# Altium PCB LED_Shield_PCB_v11.PcbDoc
Units mil, origin at the board's own origin, x right, y up, seen from the top; angles counter-clockwise.
Board outline 2700 x 2100 mil, 2 copper layers (Top Layer, Bottom Layer); 10 components, 6 nets, 24 pads, 0 vias.
Unrouted connection lines stored in the file: 15.
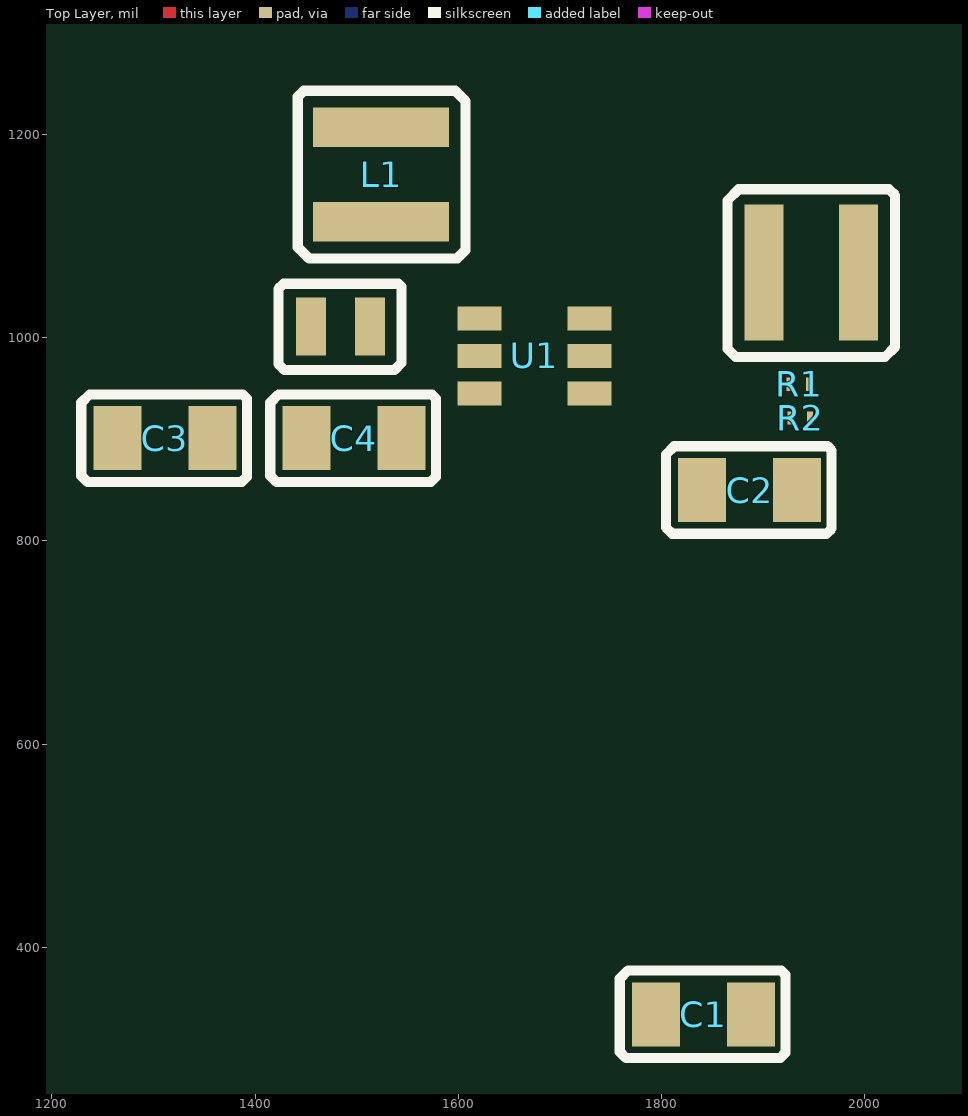
[diagram p0: Top Layer view]
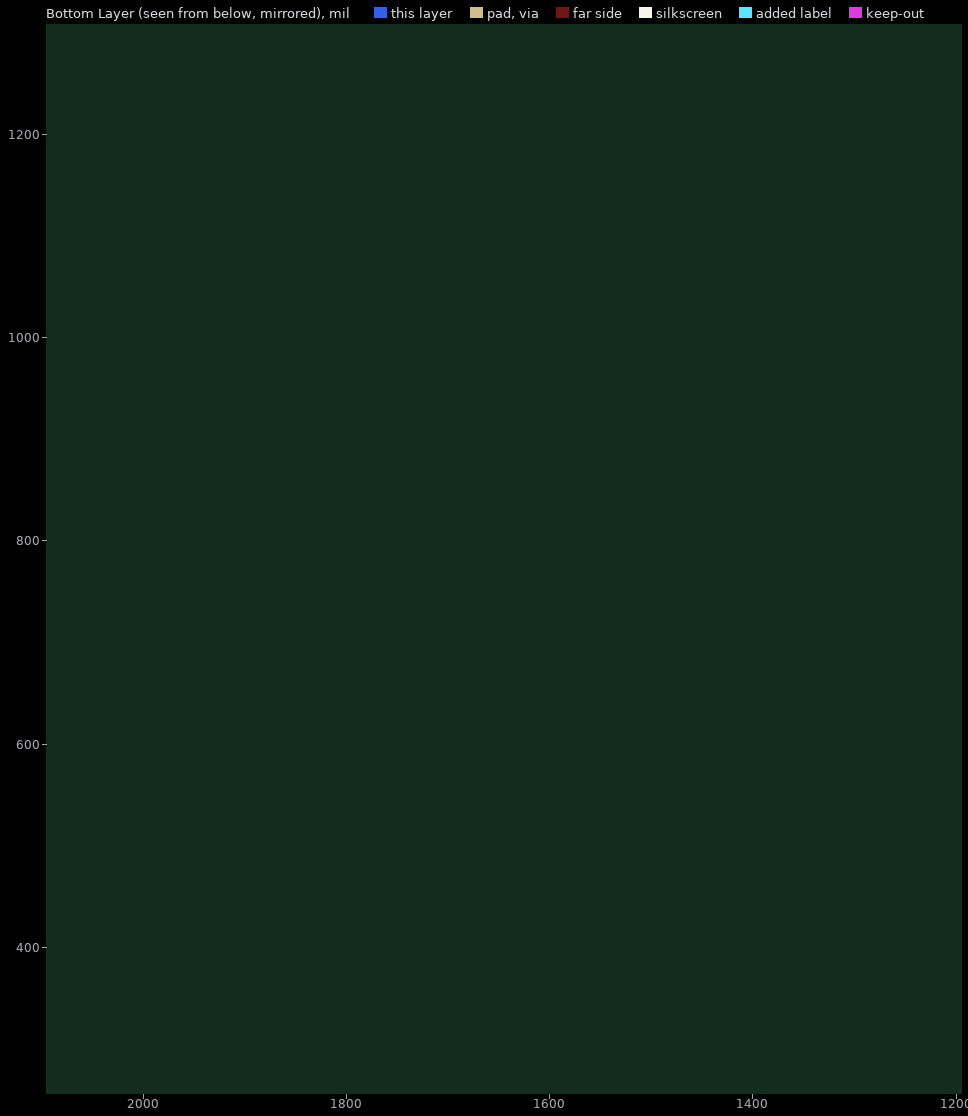
[diagram p1: Bottom Layer view, seen from below]

## Layer stack, top to bottom
Top Solder: solder mask 0.4, Solder Resist, Dk 3.5
Top Layer: signal copper 1.4
Dielectric 1: dielectric 12.6, FR-4, Dk 4.8
Bottom Layer: signal copper 1.4
Bottom Solder: solder mask 0.4, Solder Resist, Dk 3.5

## Board outline
0,0 2700,0 2700,2100 0,2100

## Design rules (kind name [scope] priority, off if disabled: settings)
Clearance [All] p1: gap=10 ignorepadtopadclearanceinfootprint=FALSE
PolygonConnect [All] p1: connectstyle=Relief reliefconductorwidth=10 reliefentries=4 polygonreliefangle="90 Angle" airgapwidth=10
RoutingVias [All] p1: holewidth=28 width=50 viastyle="Through Hole" minholewidth=28 minwidth=50 maxholewidth=28 maxwidth=50
SolderMaskExpansion [All] p1: expansion=4 istentingtop=FALSE
SupplyNets "Schematic Supply Nets" [InNet('GND')] p1: voltage=0.000
Width [All] p1: maxlimit=10 minlimit=10 preferedwidth=10
30 further rules are at their usual default settings.

## Components (designator, comment, footprint, x,y, rotation, side; value= is the part's Value field where it differs from the comment)
C1 "22uF" "C_0805 (2012 Metric)_3" 19686,-19031 r0 top value=22µF
C2 "22uF" "C_0805 (2012 Metric)_3" 19731.54,-18515 r0 top value=22µF
C3 "10uF" "C_0805 (2012 Metric)" 1309,900 r0 top value=10µF
C4 "10uF" "C_0805 (2012 Metric)" 1495,900 r0 top value=10µF
L1 "XGL4030-472MEC" "L_1616 (4040 Metric)" 1521,1159 r90 top
R1 "56.2K Ohm" "R_0201 (0603 Metric)_2" 1936,957 r0 top value=56.2kΩ
R2 "10K Ohm" "R_0201 (0603 Metric)_2" 1937,924 r0 top value=10kΩ
U1 "TPS562200DDCR" "U_SOT-23-6 Thin, TSOT-23-6" 1699,974 r0 top
? "XGL4030-472MEC" "L_1616 (4040 Metric)" 1946,1067 r0 top
? "0.1uF" "C_0805 (2012 Metric)_2" 1500,1009 r180 top value=100nF

## Footprints (in the part's own frame and the unit in brackets; to place one, negate y for a bottom-side part, rotate by r counter-clockwise, add the part's x,y. Pads: shape width x height; smd on the part's side, far side on the other; paste and mask are expansions set on the pad)
"C_0805 (2012 Metric)" [mm]
  rect 1.2x1.6 smd: 0(-1.131,0.025) 1(1.245,0.025)
  silkscreen extent -2.03,-1.07 2.11,1.12
"C_0805 (2012 Metric)_2" [mil]
  rect 29.53x57.09 smd: 0(-13,-2) 1(45,-2)
  silkscreen extent -44,-44 77,41
"C_0805 (2012 Metric)_3" [mm]
  rect 1.2x1.6 smd: 0(-454.445,491.871) 1(-452.069,491.871)
  silkscreen extent -455.35,490.78 -451.21,492.96
"L_1616 (4040 Metric)" [mil]
  rect 38.58x133.86 smd: 0(-45,-3) 1(48,-3)
  silkscreen extent -81,-86 84,79
"R_0201 (0603 Metric)_2" [mil]
  rect 5.91x12.99 smd: 0(-10,-3) 1(9,-3)
"U_SOT-23-6 Thin, TSOT-23-6" [mil]
  rect 43.31x23.62 smd: 1(-78,45) 2(-78,8) 3(-78,-29) 4(30,-29) 5(30,8) 6(30,45)

## Part data
C1 C2: library part MSASL219LB5226MTNA01, "Ceramic Capacitor, Multilayer, Ceramic, 10V, 20% +Tol, 20% -Tol, X5R, 15% TC, 22uF, Surface Mount, 0805", Dielectric Material=Ceramic, Manufacturer="TAIYO YUDEN", Max Operating Temperature=85°C, Min Operating Temperature=-55°C, Supplier Part Number=963-MSASL219LB5226MT, Voltage Rating (DC)=10V, Category="Ceramic Capacitors", ComponentLink1Description=https://datasheet.octopart.com:443/MSASL219LB5226MTNA01-Taiyo-Yuden-datasheet-182125419.pdf?src-supplier=IHS, ComponentLink1URL=https://datasheet.octopart.com:443/MSASL219LB5226MTNA01-Taiyo-Yuden-datasheet-182125419.pdf?src-supplier=IHS, Export Control Classification Number (ECCN) Code=EAR99, Harmonized Tariff Schedule (HTS) Code=8532.24.00.20, Height=850µm, Length=2mm, Lifecycle Status=Production, Manufacturer Part Number=MSASL219LB5226MTNA01, Mounting Technology="Surface Mount", Number of Terminals=2, Pricing="1=0,27, 10=0,114, 50=0,114, 100=0,101, 1000=0,072, 10000=0,067 (USD)", REACH SVHC=Yes, RoHS=Compliant, Stock=10806, Supplier=Mouser, Width=1.25mm, Introduction Date=2022-02-17
C3 C4: library part MSAST219LB5106KTNA01, "Ceramic Capacitor, Multilayer, Ceramic, 25V, 10% +Tol, 10% -Tol, X5R, 15% TC, 10uF, Surface Mount, 0805", Dielectric Material=Ceramic, Manufacturer="TAIYO YUDEN", Max Operating Temperature=85°C, Min Operating Temperature=-55°C, Voltage Rating (DC)=25V, Category="Ceramic Capacitors", ComponentLink1Description=https://datasheet.octopart.com:443/MSAST219LB5106KTNA01-Taiyo-Yuden-datasheet-182126366.pdf?src-supplier=IHS, ComponentLink1URL=https://datasheet.octopart.com:443/MSAST219LB5106KTNA01-Taiyo-Yuden-datasheet-182126366.pdf?src-supplier=IHS, Export Control Classification Number (ECCN) Code=EAR99, Harmonized Tariff Schedule (HTS) Code=8532.24.00.20, Height=850µm, Length=2mm, Lifecycle Status=Production, Manufacturer Part Number=MSAST219LB5106KTNA01, Mounting Technology="Surface Mount", Number of Terminals=2, Pricing="1=0,0066 (USD)", REACH SVHC=Yes, RoHS=Compliant, Stock=7, Supplier="Arrow Electronics", Supplier Part Number=MSAST219LB5106KTNA01, Width=1.25mm, Introduction Date=2022-02-17
L1 ?: "4.7 µH Shielded Molded Inductor 6.6 A 31.5mOhm Max 1616 (4040 Metric)"
R1: library part RC0201FR-0756K2L, "Res Thick Film 0201 56.2K Ohm 1% 0.05W(1/20W) ±200ppm/C Molded SMD Paper T/R", Case Code (Metric)=0603, Case Code (Imperial)=0201, Manufacturer="Yageo Group", Max Operating Temperature=125°C, Max Power Dissipation=50mW, Min Operating Temperature=-55°C, Supplier Part Number=3951640, Temperature Coefficient=200ppm/°C, Tolerance=1%, Voltage Rating=25V, Case/Package=0201, Category="Chip SMD Resistors", China RoHS=Non-Compliant, ComponentLink1Description=https://datasheet.octopart.com:443/RC0201FR-0756K2L-Yageo-datasheet-175887523.pdf?src-supplier=IHS, ComponentLink1URL=https://datasheet.octopart.com:443/RC0201FR-0756K2L-Yageo-datasheet-175887523.pdf?src-supplier=IHS, ComponentLink2Description=https://datasheet.octopart.com:443/RC0201FR-0756K2L-Yageo-datasheet-13314888.pdf?src-supplier=Upverter, ComponentLink2URL=https://datasheet.octopart.com:443/RC0201FR-0756K2L-Yageo-datasheet-13314888.pdf?src-supplier=Upverter, ComponentLink3Description=https://datasheet.octopart.com:443/RC0201FR-0756K2L-Yageo-datasheet-12549147.pdf?src-supplier=Upverter, ComponentLink3URL=https://datasheet.octopart.com:443/RC0201FR-0756K2L-Yageo-datasheet-12549147.pdf?src-supplier=Upverter, ComponentLink4Description=https://datasheet.octopart.com:443/RC0201FR-0756K2L-Yageo-datasheet-12509741.pdf?src-supplier=Upverter, ComponentLink4URL=https://datasheet.octopart.com:443/RC0201FR-0756K2L-Yageo-datasheet-12509741.pdf?src-supplier=Upverter, ComponentLink5Description=https://datasheet.octopart.com:443/RC0201FR-0756K2L-Yageo-datasheet-12509713.pdf?src-supplier=Upverter, ComponentLink5URL=https://datasheet.octopart.com:443/RC0201FR-0756K2L-Yageo-datasheet-12509713.pdf?src-supplier=Upverter, ComponentLink6Description=https://datasheet.octopart.com:443/RC0201FR-0756K2L-Yageo-Group-datasheet-176638170.pdf?src-supplier=Future+Electronics, ComponentLink6URL=https://datasheet.octopart.com:443/RC0201FR-0756K2L-Yageo-Group-datasheet-176638170.pdf?src-supplier=Future+Electronics, ComponentLink7Description=https://datasheet.octopart.com:443/RC0201FR-0756K2L-Yageo-datasheet-164759695.pdf?src-supplier=Future+Electronics, ComponentLink7URL=https://datasheet.octopart.com:443/RC0201FR-0756K2L-Yageo-datasheet-164759695.pdf?src-supplier=Future+Electronics, ComponentLink8Description=https://datasheet.octopart.com:443/RC0201FR-0756K2L-Yageo-datasheet-137700087.pdf?src-supplier=Future+Electronics, ComponentLink8URL=https://datasheet.octopart.com:443/RC0201FR-0756K2L-Yageo-datasheet-137700087.pdf?src-supplier=Future+Electronics, ComponentLink9Description=https://datasheet.octopart.com/RC0201FR-0756K2L-Yageo-datasheet-73766026.pdf, ComponentLink9URL=https://datasheet.octopart.com/RC0201FR-0756K2L-Yageo-datasheet-73766026.pdf, ComponentLink10Description=http://sigma.octopart.com:80/conflict_mineral_statement/Yageo-company-3.pdf?src-supplier=Compliance+Statements, ComponentLink10URL=http://sigma.octopart.com:80/conflict_mineral_statement/Yageo-company-3.pdf?src-supplier=Compliance+Statements, ComponentLink11Description=http://sigma.octopart.com:80/rohs_statement/Yageo-company-2.pdf?src-supplier=Compliance+Statements, ComponentLink11URL=http://sigma.octopart.com:80/rohs_statement/Yageo-company-2.pdf?src-supplier=Compliance+Statements, Composition="Thick Film", Country of Origin="Mainland China, Taiwan", Depth=300µm, Export Control Classification Number (ECCN) Code=EAR99, Features="Moisture Resistant", Harmonized Tariff Schedule (HTS) Code=8533.21.00.30, Height=230µm, Length=600µm, Lifecycle Status=Production, Manufacturer Part Number=RC0201FR-0756K2L, Military Standard=Not, Mounting Technology="Surface Mount", Number of Terminals=2, Number of Terminations=2, Power Dissipation=50mW, Power Rating=50mW, Pricing="10=0,0121, 100=0,0086, 500=0,0066, 2500=0,0039, 5000=0,0038 (EUR)", REACH SVHC=Yes, RoHS=Compliant, Schedule B="8533210045, 8533210045|8533210045, 8533210045|8533210045|8533210045, 8533210045|8533210045|8533210045|8533210045", Stock=32331, Supplier=Farnell, Width=300µm, Working Voltage=25V, Introduction Date=2008-07-18
R2: library part RC0201FR-0710KL, "Res Thick Film 0201 10K Ohm 1% 0.05W(1/20W) ±200ppm/C Pad SMD T/R", Case Code (Metric)=0603, Case Code (Imperial)=0201, Manufacturer="Yageo Group", Max Operating Temperature=125°C, Max Power Dissipation=50mW, Min Operating Temperature=-55°C, Supplier Part Number=1857008, Temperature Coefficient=200ppm/°C, Tolerance=1%, Voltage Rating=25V, Case/Package=0201, Category="Chip SMD Resistors", China RoHS=Non-Compliant, ComponentLink1Description=https://datasheet.octopart.com:443/RC0201FR-0710KL-Yageo-datasheet-175887523.pdf?src-supplier=IHS, ComponentLink1URL=https://datasheet.octopart.com:443/RC0201FR-0710KL-Yageo-datasheet-175887523.pdf?src-supplier=IHS, ComponentLink2Description=https://datasheet.octopart.com:443/RC0201FR-0710KL-Yageo-datasheet-12509713.pdf?src-supplier=element14+APAC, ComponentLink2URL=https://datasheet.octopart.com:443/RC0201FR-0710KL-Yageo-datasheet-12509713.pdf?src-supplier=element14+APAC, ComponentLink3Description=https://datasheet.octopart.com:443/RC0201FR-0710KL-Yageo-datasheet-62067350.pdf?src-supplier=element14+APAC, ComponentLink3URL=https://datasheet.octopart.com:443/RC0201FR-0710KL-Yageo-datasheet-62067350.pdf?src-supplier=element14+APAC, ComponentLink4Description=https://datasheet.octopart.com:443/RC0201FR-0710KL-Yageo-datasheet-10911895.pdf?src-supplier=element14+APAC, ComponentLink4URL=https://datasheet.octopart.com:443/RC0201FR-0710KL-Yageo-datasheet-10911895.pdf?src-supplier=element14+APAC, ComponentLink5Description=https://datasheet.octopart.com:443/RC0201FR-0710KL-Yageo-datasheet-13314888.pdf?src-supplier=Upverter, ComponentLink5URL=https://datasheet.octopart.com:443/RC0201FR-0710KL-Yageo-datasheet-13314888.pdf?src-supplier=Upverter, ComponentLink6Description=https://datasheet.octopart.com:443/RC0201FR-0710KL-Yageo-datasheet-12549147.pdf?src-supplier=Upverter, ComponentLink6URL=https://datasheet.octopart.com:443/RC0201FR-0710KL-Yageo-datasheet-12549147.pdf?src-supplier=Upverter, ComponentLink7Description=https://datasheet.octopart.com:443/RC0201FR-0710KL-Yageo-datasheet-12509741.pdf?src-supplier=Upverter, ComponentLink7URL=https://datasheet.octopart.com:443/RC0201FR-0710KL-Yageo-datasheet-12509741.pdf?src-supplier=Upverter, ComponentLink8Description=https://datasheet.octopart.com:443/RC0201FR-0710KL-Yageo-Group-datasheet-190305687.pdf?src-supplier=Newark, ComponentLink8URL=https://datasheet.octopart.com:443/RC0201FR-0710KL-Yageo-Group-datasheet-190305687.pdf?src-supplier=Newark, ComponentLink9Description=https://datasheet.octopart.com:443/RC0201FR-0710KL-Yageo-datasheet-10025917.pdf?src-supplier=Newark, ComponentLink9URL=https://datasheet.octopart.com:443/RC0201FR-0710KL-Yageo-datasheet-10025917.pdf?src-supplier=Newark, ComponentLink10Description=https://datasheet.octopart.com:443/RC0201FR-0710KL-Yageo-Group-datasheet-176638170.pdf?src-supplier=Future+Electronics, ComponentLink10URL=https://datasheet.octopart.com:443/RC0201FR-0710KL-Yageo-Group-datasheet-176638170.pdf?src-supplier=Future+Electronics, ComponentLink11Description=https://datasheet.octopart.com:443/RC0201FR-0710KL-Yageo-datasheet-164759695.pdf?src-supplier=Future+Electronics, ComponentLink11URL=https://datasheet.octopart.com:443/RC0201FR-0710KL-Yageo-datasheet-164759695.pdf?src-supplier=Future+Electronics, ComponentLink12Description=https://datasheet.octopart.com:443/RC0201FR-0710KL-Yageo-datasheet-127823281.pdf?src-supplier=Future+Electronics, ComponentLink12URL=https://datasheet.octopart.com:443/RC0201FR-0710KL-Yageo-datasheet-127823281.pdf?src-supplier=Future+Electronics, ComponentLink13Description=https://datasheet.octopart.com:443/RC0201FR-0710KL-Yageo-datasheet-137700087.pdf?src-supplier=Future+Electronics, ComponentLink13URL=https://datasheet.octopart.com:443/RC0201FR-0710KL-Yageo-datasheet-137700087.pdf?src-supplier=Future+Electronics, ComponentLink14Description=https://datasheet.octopart.com:443/RC0201FR-0710KL-Yageo-datasheet-103092701.pdf?src-supplier=Future+Electronics, ComponentLink14URL=https://datasheet.octopart.com:443/RC0201FR-0710KL-Yageo-datasheet-103092701.pdf?src-supplier=Future+Electronics, ComponentLink15Description=https://datasheet.octopart.com:443/RC0201FR-0710KL-Yageo-datasheet-98239111.pdf?src-supplier=Future+Electronics, ComponentLink15URL=https://datasheet.octopart.com:443/RC0201FR-0710KL-Yageo-datasheet-98239111.pdf?src-supplier=Future+Electronics, ComponentLink16Description=https://datasheet.octopart.com:443/RC0201FR-0710KL-Yageo-datasheet-44382975.pdf?src-supplier=Future+Electronics, ComponentLink16URL=https://datasheet.octopart.com:443/RC0201FR-0710KL-Yageo-datasheet-44382975.pdf?src-supplier=Future+Electronics, ComponentLink17Description=https://datasheet.octopart.com:443/RC0201FR-0710KL-Yageo-datasheet-41589693.pdf?src-supplier=Future+Electronics, ComponentLink17URL=https://datasheet.octopart.com:443/RC0201FR-0710KL-Yageo-datasheet-41589693.pdf?src-supplier=Future+Electronics, ComponentLink18Description=https://datasheet.octopart.com:443/RC0201FR-0710KL-Yageo-datasheet-37140709.pdf?src-supplier=Future+Electronics, ComponentLink18URL=https://datasheet.octopart.com:443/RC0201FR-0710KL-Yageo-datasheet-37140709.pdf?src-supplier=Future+Electronics, ComponentLink19Description=https://datasheet.octopart.com:443/RC0201FR-0710KL-Yageo-datasheet-12509768.pdf?src-supplier=Future+Electronics, ComponentLink19URL=https://datasheet.octopart.com:443/RC0201FR-0710KL-Yageo-datasheet-12509768.pdf?src-supplier=Future+Electronics, ComponentLink20Description=https://datasheet.octopart.com:443/RC0201FR-0710KL-Yageo-datasheet-12590898.pdf?src-supplier=Future+Electronics, ComponentLink20URL=https://datasheet.octopart.com:443/RC0201FR-0710KL-Yageo-datasheet-12590898.pdf?src-supplier=Future+Electronics, ComponentLink21Description=https://datasheet.octopart.com:443/RC0201FR-0710KL-Yageo-datasheet-5319114.pdf?src-supplier=Future+Electronics, ComponentLink21URL=https://datasheet.octopart.com:443/RC0201FR-0710KL-Yageo-datasheet-5319114.pdf?src-supplier=Future+Electronics, ComponentLink22Description=https://datasheet.octopart.com:443/RC0201FR-0710KL-Yageo-datasheet-12535854.pdf?src-supplier=Future+Electronics, ComponentLink22URL=https://datasheet.octopart.com:443/RC0201FR-0710KL-Yageo-datasheet-12535854.pdf?src-supplier=Future+Electronics, ComponentLink23Description=https://datasheet.octopart.com:443/RC0201FR-0710KL-Yageo-datasheet-148775077.pdf?src-supplier=TME, ComponentLink23URL=https://datasheet.octopart.com:443/RC0201FR-0710KL-Yageo-datasheet-148775077.pdf?src-supplier=TME, ComponentLink24Description=https://datasheet.octopart.com/RC0201FR-0710KL-Yageo-datasheet-73766026.pdf, ComponentLink24URL=https://datasheet.octopart.com/RC0201FR-0710KL-Yageo-datasheet-73766026.pdf, ComponentLink25Description=https://datasheet.octopart.com:443/RC0201FR-0710KL-Yageo-datasheet-8701561.pdf?src-supplier=element14, ComponentLink25URL=https://datasheet.octopart.com:443/RC0201FR-0710KL-Yageo-datasheet-8701561.pdf?src-supplier=element14, ComponentLink26Description=http://sigma.octopart.com:80/conflict_mineral_statement/Yageo-company-3.pdf?src-supplier=Compliance+Statements, ComponentLink26URL=http://sigma.octopart.com:80/conflict_mineral_statement/Yageo-company-3.pdf?src-supplier=Compliance+Statements, ComponentLink27Description=http://sigma.octopart.com:80/rohs_statement/Yageo-company-2.pdf?src-supplier=Compliance+Statements, ComponentLink27URL=http://sigma.octopart.com:80/rohs_statement/Yageo-company-2.pdf?src-supplier=Compliance+Statements, Composition="Thick Film", Contact Plating=Tin, Country of Origin="Mainland China, Taiwan", Depth=300µm, Export Control Classification Number (ECCN) Code=EAR99, Features="Moisture Resistant", Harmonized Tariff Schedule (HTS) Code=8533.21.00.30, Height=230µm, Lead Free="Lead Free", Length=600µm, Lifecycle Status=Production, Manufacturer Part Number=RC0201FR-0710KL, Military Standard=Not, Mounting Technology="Surface Mount", Number of Terminals=2, Number of Terminations=2, Packaging="Tape & Reel", Pins=2, Power Dissipation=50mW, Power Rating=50mW, Pricing="10=0,0092, 100=0,0072, 500=0,0059, 2500=0,0046, 5000=0,0045 (EUR)", Radiation Hardening=No, REACH SVHC=Yes, RoHS=Compliant, Schedule B="8533210045, 8533210045|8533210045|8533210045|8533210045|8533210045|8533210045|8533210045|8533210045|8533210045|8533210045|8533210045|8533210045|8533210045|8533210045|8533210045|8533210045|8533210045|8533210045|8533210045, 8533210045|8533210045|8533210045|8533210045|8533210045|8533210045|8533210045|8533210045|8533210045|8533210045|8533210045|8533210045|8533210045|8533210045|8533210045|8533210045|8533210045|8533210045|8533210045|8533210045, 8533210045|8533210045|8533210045|8533210045|8533210045|8533210045|8533210045|8533210045|8533210045|8533210045|8533210045|8533210045|8533210045|8533210045|8533210045|8533210045|8533210045|8533210045|8533210045|8533210045|8533210045", Stock=170907, Supplier=Farnell, Termination=SMD/SMT, Voltage Rating (DC)=25V, Weight=170.097139µg, Width=300µm, Working Voltage=25V, Introduction Date=2008-07-18
U1: library part TPS562200DDCR_1, "Conv DC-DC 4.5V to 17V Step Down Single-Out 0.67V to 7V 2A 6-Pin TSOT-23 T/R", Ambient Temperature Range High=85°C, Case/Package=SOT-23-6, Manufacturer="Texas Instruments", Manufacturer Lifecycle Status=ACTIVE, Max Junction Temperature (Tj)=150°C, Max Operating Temperature=125°C, Max Output current=2A, Max Output Voltage=7V, Max Supply Voltage=17V, Min Operating Temperature=-40°C, Min Output Voltage=765mV, Min Supply Voltage=4.5V, Nominal Supply Current=230µA, Output Voltage=1.05V, Switching Frequency=650kHz, Category="Voltage Regulators - Switching", ComponentLink1Description=https://sigma.octopart.com:443/180581133/technical_drawing/Texas-Instruments-TPS562200DDCR.pdf?src-supplier=Texas+Instruments, ComponentLink1URL=https://sigma.octopart.com:443/180581133/technical_drawing/Texas-Instruments-TPS562200DDCR.pdf?src-supplier=Texas+Instruments, ComponentLink2Description=https://octopart.com:443/opatz8j6/c1?t=2utKubAfpiZARX5nFmsE5hGk-Y-tapj6pD_xDeMavGILmoCS9J2eAjjTjNW5Z9c81h6alCPz7bJak1jHKeuWNAeaEIwGhAOxkrndFGX56Qt-YTBzMSW5WpBFdiamkSgyJwOWbAqhxLCfwYLVTxlMZ3D8olLGDhK9RqQ3qjVP-W0npcJpvlqS_C2JNbfqAdkRII-uSWYYqmMgwYeGA5yIbbvEjU5phFCuYsjJv_b7aQSoOIgzwGiDRTTWzzO_HqVSYJIJZJ4c3RZs3GIMQ7XGM0Tmug74GIe09f5U_717lcCnX6GkmB4tYX5l7RHdDg8UKRkvjrB66qfKxFpTpb8aDJ9_oKYvujJkg67F35zetmHwPDR4DgWTV3Fi_ByFnpJz6qQT-ugHig&src-supplier=Texas+Instruments, ComponentLink2URL=https://octopart.com:443/opatz8j6/c1?t=2utKubAfpiZARX5nFmsE5hGk-Y-tapj6pD_xDeMavGILmoCS9J2eAjjTjNW5Z9c81h6alCPz7bJak1jHKeuWNAeaEIwGhAOxkrndFGX56Qt-YTBzMSW5WpBFdiamkSgyJwOWbAqhxLCfwYLVTxlMZ3D8olLGDhK9RqQ3qjVP-W0npcJpvlqS_C2JNbfqAdkRII-uSWYYqmMgwYeGA5yIbbvEjU5phFCuYsjJv_b7aQSoOIgzwGiDRTTWzzO_HqVSYJIJZJ4c3RZs3GIMQ7XGM0Tmug74GIe09f5U_717lcCnX6GkmB4tYX5l7RHdDg8UKRkvjrB66qfKxFpTpb8aDJ9_oKYvujJkg67F35zetmHwPDR4DgWTV3Fi_ByFnpJz6qQT-ugHig&src-supplier=Texas+Instruments, ComponentLink3Description=https://sigma.octopart.com:443/179311906/technical_drawing/Texas-Instruments-TPS562200DDCR.pdf?src-supplier=Texas+Instruments, ComponentLink3URL=https://sigma.octopart.com:443/179311906/technical_drawing/Texas-Instruments-TPS562200DDCR.pdf?src-supplier=Texas+Instruments, ComponentLink4Description=https://sigma.octopart.com:443/159779760/technical_drawing/Texas-Instruments-TPS562200DDCR.pdf?src-supplier=Texas+Instruments, ComponentLink4URL=https://sigma.octopart.com:443/159779760/technical_drawing/Texas-Instruments-TPS562200DDCR.pdf?src-supplier=Texas+Instruments, ComponentLink5Description=https://sigma.octopart.com:443/149167535/technical_drawing/Texas-Instruments-TPS562200DDCR.pdf?src-supplier=Texas+Instruments, ComponentLink5URL=https://sigma.octopart.com:443/149167535/technical_drawing/Texas-Instruments-TPS562200DDCR.pdf?src-supplier=Texas+Instruments, ComponentLink6Description=https://datasheet.octopart.com:443/TPS562200DDCR-Texas-Instruments-datasheet-37741624.pdf?src-supplier=Texas+Instruments, ComponentLink6URL=https://datasheet.octopart.com:443/TPS562200DDCR-Texas-Instruments-datasheet-37741624.pdf?src-supplier=Texas+Instruments, ComponentLink7Description=https://datasheet.octopart.com:443/TPS562200DDCR-Texas-Instruments-datasheet-32015787.pdf?src-supplier=Texas+Instruments, ComponentLink7URL=https://datasheet.octopart.com:443/TPS562200DDCR-Texas-Instruments-datasheet-32015787.pdf?src-supplier=Texas+Instruments, ComponentLink8Description=https://datasheet.octopart.com:443/TPS562200DDCR-Texas-Instruments-datasheet-22069471.pdf?src-supplier=Texas+Instruments, ComponentLink8URL=https://datasheet.octopart.com:443/TPS562200DDCR-Texas-Instruments-datasheet-22069471.pdf?src-supplier=Texas+Instruments, ComponentLink9Description=https://sigma.octopart.com:443/49250152/technical_drawing/Texas-Instruments-TPS562200DDCR.pdf?src-supplier=Texas+Instruments, ComponentLink9URL=https://sigma.octopart.com:443/49250152/technical_drawing/Texas-Instruments-TPS562200DDCR.pdf?src-supplier=Texas+Instruments, ComponentLink10Description=https://datasheet.octopart.com:443/TPS562200DDCR-Texas-Instruments-datasheet-66617798.pdf?src-supplier=element14+APAC, ComponentLink10URL=https://datasheet.octopart.com:443/TPS562200DDCR-Texas-Instruments-datasheet-66617798.pdf?src-supplier=element14+APAC, ComponentLink11Description=https://datasheet.octopart.com:443/TPS562200DDCR-Texas-Instruments-datasheet-62313215.pdf?src-supplier=Newark, ComponentLink11URL=https://datasheet.octopart.com:443/TPS562200DDCR-Texas-Instruments-datasheet-62313215.pdf?src-supplier=Newark, ComponentLink12Description=https://datasheet.octopart.com:443/TPS562200DDCR-Texas-Instruments-datasheet-62292600.pdf?src-supplier=Farnell, ComponentLink12URL=https://datasheet.octopart.com:443/TPS562200DDCR-Texas-Instruments-datasheet-62292600.pdf?src-supplier=Farnell, ComponentLink13Description=https://datasheet.octopart.com:443/TPS562200DDCR-Texas-Instruments-datasheet-165804781.pdf?src-supplier=LCSC, ComponentLink13URL=https://datasheet.octopart.com:443/TPS562200DDCR-Texas-Instruments-datasheet-165804781.pdf?src-supplier=LCSC, ComponentLink14Description=https://datasheet.octopart.com:443/TPS562200DDCR-Texas-Instruments-datasheet-159118148.pdf?src-supplier=LCSC, ComponentLink14URL=https://datasheet.octopart.com:443/TPS562200DDCR-Texas-Instruments-datasheet-159118148.pdf?src-supplier=LCSC, ComponentLink15Description=https://datasheet.octopart.com:443/TPS562200DDCR-Texas-Instruments-datasheet-137316104.pdf?src-supplier=Future+Electronics, ComponentLink15URL=https://datasheet.octopart.com:443/TPS562200DDCR-Texas-Instruments-datasheet-137316104.pdf?src-supplier=Future+Electronics, ComponentLink16Description=http://sigma.octopart.com:80/reach_statement/Texas-Instruments-company-64.pdf?src-supplier=Compliance+Statements, ComponentLink16URL=http://sigma.octopart.com:80/reach_statement/Texas-Instruments-company-64.pdf?src-supplier=Compliance+Statements, ComponentLink17Description=http://sigma.octopart.com:80/conflict_mineral_statement/Texas-Instruments-company-63.pdf?src-supplier=Compliance+Statements, ComponentLink17URL=http://sigma.octopart.com:80/conflict_mineral_statement/Texas-Instruments-company-63.pdf?src-supplier=Compliance+Statements, Contact Plating=Tin, Height=1.1mm, Lead Free="Lead Free", Length=2.9mm, Lifecycle Status=Production, Manufacturer Part Number=TPS562200DDCR, Max Duty Cycle=65%, Min Input Voltage=4.5V, Mounting Technology="Surface Mount", Number of Channels=1, Number of Outputs=1, Operating Supply Voltage=17V, Output Configuration=Positive, Output Current=2A, Output Type=Adjustable, Pins=6, Pricing="3000=0,3243, 6000=0,3137, 9000=0,3113 (USD)", Quiescent Current=230µA, Radiation Hardening=No, REACH SVHC=No, RoHS=Compliant, Schedule B=8542390000, Stock=33000, Supplier="Arrow Electronics", Supplier Part Number=TPS562200DDCR, Synchronous Rectifier=Yes, Thickness=870µm, Topology=Buck, Weight=36.003894mg, Width=1.6mm
?: library part KGM21NR71E104KT, "Ceramic Capacitor, Multilayer, Ceramic, 25V, 10% +Tol, 10% -Tol, X7R, 15% TC, 0.1uF, Surface Mount, 0805", Dielectric Material=Ceramic, Manufacturer="KYOCERA AVX", Max Operating Temperature=125°C, Min Operating Temperature=-55°C, Supplier Part Number=4183759, Voltage Rating (DC)=25V, Category="Ceramic Capacitors", ComponentLink1Description=https://datasheet.octopart.com:443/KGM21NR71E104KT-KYOCERA-AVX-datasheet-179280988.pdf?src-supplier=IHS, ComponentLink1URL=https://datasheet.octopart.com:443/KGM21NR71E104KT-KYOCERA-AVX-datasheet-179280988.pdf?src-supplier=IHS, ComponentLink2Description=https://datasheet.octopart.com:443/KGM21NR71E104KT-KYOCERA-AVX-datasheet-178027269.pdf?src-supplier=TME, ComponentLink2URL=https://datasheet.octopart.com:443/KGM21NR71E104KT-KYOCERA-AVX-datasheet-178027269.pdf?src-supplier=TME, ComponentLink3Description=https://datasheet.octopart.com:443/KGM21NR71E104KT-KYOCERA-AVX-datasheet-175509538.pdf?src-supplier=Future+Electronics, ComponentLink3URL=https://datasheet.octopart.com:443/KGM21NR71E104KT-KYOCERA-AVX-datasheet-175509538.pdf?src-supplier=Future+Electronics, ComponentLink4Description=http://sigma.octopart.com:80/conflict_mineral_statement/AVX-company-34.pdf?src-supplier=Compliance+Statements, ComponentLink4URL=http://sigma.octopart.com:80/conflict_mineral_statement/AVX-company-34.pdf?src-supplier=Compliance+Statements, ComponentLink5Description=http://sigma.octopart.com:80/reach_statement/AVX-company-19.pdf?src-supplier=Compliance+Statements, ComponentLink5URL=http://sigma.octopart.com:80/reach_statement/AVX-company-19.pdf?src-supplier=Compliance+Statements, Height=1mm, Length=2.01mm, Lifecycle Status=Production, Manufacturer Part Number=KGM21NR71E104KT, Mounting Technology="Surface Mount", Number of Terminals=2, Pricing="4000=0,0166, 12000=0,0162, 20000=0,016, 60000=0,0157, 100000=0,0153 (USD)", REACH SVHC=Yes, RoHS=Compliant, Stock=4000, Supplier="Future Electronics", Width=1.25mm

## Nets (pads, with @x,y where several pads share a name; then routed paths per layer and width w, separated by ;. In a path a pad name is that pad's centre, name@x,y a point inside that pad or via, vN(x,y) a via of type N, cw(c..) or ccw(c..) an arc to the next point about the centre after c; other vN are vias at no path point)
GND: C1.0 C2.0 C3.0 C4.0 R2.0 U1.1
"Net _0": ?.0@1513,1011 L1.0
"Net _1": ?.1@1455,1011 U1.6
NetC1_1: C1.1 C2.1 L1.1 R1.1
NetC3_1: C3.1 C4.1 U1.3 U1.5
NetR1_0: R1.0 R2.1 U1.4
pads on no net: ?.0@1901,1064 ?.1@1994,1064 U1.2